# EAGLE board max6_breakout_1575AT43A40 (EAGLE 6.2)
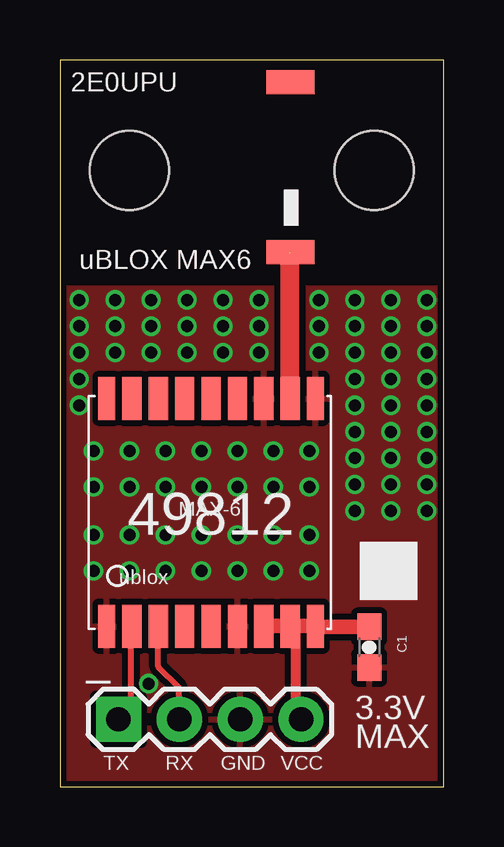
[diagram p0: board, top side]
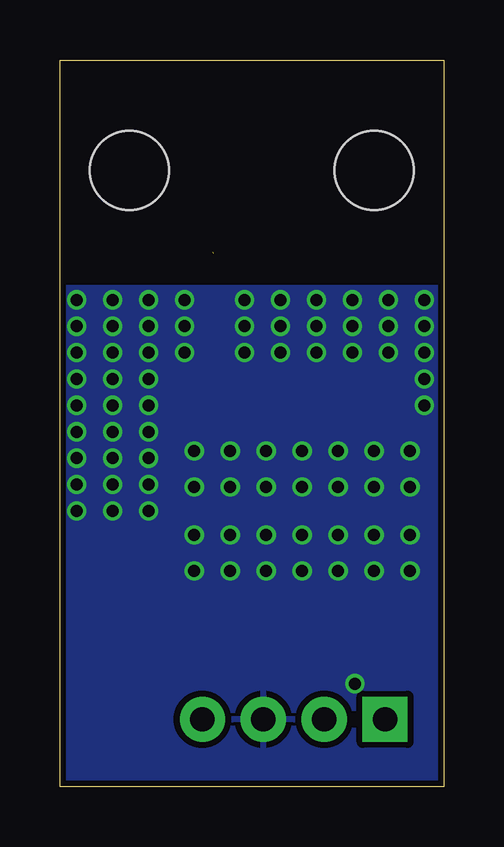
[diagram p1: board, bottom side, seen from below]

Size 16 x 30.3 mm. Coordinates in mm from the lower left corner, seen from the top.
Outline: 0,0 16,0 16,30.3 0,30.3 0,0
Copper layers (1*16): Top 0.035mm / dielectric 1.5mm / Bottom 0.035mm
Design rules: minimum track width 6mil, minimum drill 12mil, track to track 6mil, track to pad 6mil, pad to pad 6mil, via to via 6mil, smd to smd 0mil, copper to edge 10mil, drill to drill 10mil, minimum pad ring 10mil, minimum via ring 6mil, stop-mask expansion 2mil, vias tented up to drill 100mil, thermal gap 10mil

## Footprints (pad centres in the part's own frame; a part is rotated, then mirrored left to right if it is on the bottom)
1X04 = drill 1.016 pad 1.88 square: 1 0,0 | drill 1.016 pad 1.88: 2 2.54,0; 3 5.08,0; 4 7.62,0
0603-CAP = smd 1.1 x 1: 1 -0.85,0; 2 0.85,0
STAND-OFF = hole 3.302: 0,0
UBLOX_MAX-6 = smd 1.8 x 0.7: 1_GND 4.95,-4.4; 9_V_RESET 4.95,4.3; 10_GND -4.55,4.3; 18_RESERVED -4.55,-4.4 | smd 1.8 x 0.8: 2_TXD1 4.95,-3.35; 3_RXD1 4.95,-2.25; 4_TIMEPULSE 4.95,-1.15; 5_EXTINT0 4.95,-0.05; 6_V_BCKP 4.95,1.05; 7_VCC_IO 4.95,2.15; 8_VCC 4.95,3.25; 11_RF_IN -4.55,3.25; 12_GND -4.55,2.15; 13_ANTON -4.55,1.05; 14_VCC_RF -4.55,-0.05; 15_RESERVED -4.55,-1.15; 16_SDA2 -4.55,-2.25; 17_SCL2 -4.55,-3.35
JTI_ANTENNA-1575AT43A40 = smd 1 x 2: FEED -3.81,-1.27; NC 3.29,-1.27

## Placement (x,y rotation side)
_  [1X04]  2.44,2.81 0 top
C1  100nF  [0603-CAP]  12.9,5.82 270 top
JP1  STAND-OFF  [STAND-OFF]  2.9,25.7 0 top
JP2  STAND-OFF  [STAND-OFF]  13.1,25.7 0 top
U$1  UBLOX_MAX-6  [UBLOX_MAX-6]  6.35,11.64 270 top
U$2  JTI_ANTENNA-1575AT43A40  [JTI_ANTENNA-1575AT43A40]  8.34,26.09 90 top

## Library data of the parts
_ C1 JP1 JP2 = SparkFun
U$1 U$2 = ava

## Nets
GND: _.3 C1.2 U$1.1_GND U$1.6_V_BCKP U$1.10_GND U$1.12_GND
N$2: U$1.11_RF_IN U$2.FEED
RXD1: _.2 U$1.3_RXD1
TXD1: _.1 U$1.2_TXD1
VCC: _.4 C1.1 U$1.7_VCC_IO U$1.8_VCC U$1.9_V_RESET

## Tracks (layer width: path | path; a pad name or v marks a point on that pad's centre or on a via)
GND  (via drill 0.5)
  other vias: 8.3,20.3 8.3,19.2 8.3,18.1 10.8,18.1 10.8,19.2 10.8,20.3 1.4,14 1.4,9 1.4,10.5 1.4,12.5 2.9,14 2.9,9 2.9,10.5 2.9,12.5 10.4,14 10.4,9 10.4,10.5 10.4,12.5 7.4,14 7.4,9 7.4,10.5 7.4,12.5 8.9,14 8.9,9 8.9,10.5 8.9,12.5 4.4,14 4.4,9 4.4,10.5 4.4,12.5 5.9,14 5.9,9 5.9,10.5 5.9,12.5 12.3,20.3 13.8,20.3 12.3,19.2 13.8,19.2 12.3,18.1 13.8,18.1 3.7,4.3 0.8,18.1 0.8,19.2 0.8,20.3 2.3,20.3 2.3,19.2 2.3,18.1 3.8,18.1 3.8,19.2 3.8,20.3 5.3,20.3 6.8,20.3 5.3,19.2 6.8,19.2 5.3,18.1 6.8,18.1 15.3,20.3 15.3,19.2 15.3,18.1 12.3,17 13.8,17 12.3,15.9 13.8,15.9 12.3,14.8 13.8,14.8 15.3,17 15.3,15.9 15.3,14.8 12.3,13.7 13.8,13.7 12.3,12.6 13.8,12.6 12.3,11.5 13.8,11.5 15.3,13.7 15.3,12.6 15.3,11.5 0.8,15.9 0.8,17
  pour Bottom (isolate 0.254): 0,20.8 16,20.8 16,0.3 0,0.3
  pour Top (isolate 0.254): 0,20.8 16,20.8 16,0.3 0,0.3
N$2  (1 unrouted)
  Top 0.8: U$1.11_RF_IN 9.6,22.25
RXD1
  Top 0.152: 4.16,6.62 U$1.3_RXD1 | 4.96,2.86 _.2
  Top 0.25: 4.96,2.86 4.96,3.9 4.96,4.14 4.1,5 U$1.3_RXD1
TXD1
  Top 0.152: 2.96,6.62 U$1.2_TXD1 | 2.48,2.86 _.1
  Top 0.25: 2.96,6.62 2.96,3.34 2.48,2.86
VCC
  Top 0.152: 8.56,6.7 U$1.7_VCC_IO | 10.7,6.66 10.72,7.26 10.72,6.7 U$1.9_V_RESET | 9.84,3.74 10,3.58 10,2.86 _.4 | 9.84,6.7 U$1.8_VCC 9.84,6.7
  Top 0.406: 9.84,3.74 9.84,6.7
  Top 0.61: U$1.8_VCC 8.56,6.7 | 10.7,6.66 C1.1 | U$1.9_V_RESET 9.84,6.7

## Text on the board
tPlace: 2E0UPU | uBLOX MAX6 | 49812 | 3.3V | MAX | TX | RX | GND | VCC